# Altium PCB Controller.PcbDoc
Units mil, origin at the board's own origin, x right, y up, seen from the top; angles counter-clockwise.
Board outline 1190 x 2860 mil, 2 copper layers (Top Layer, Bottom Layer); 18 components, 12 nets, 56 pads, 16 vias.
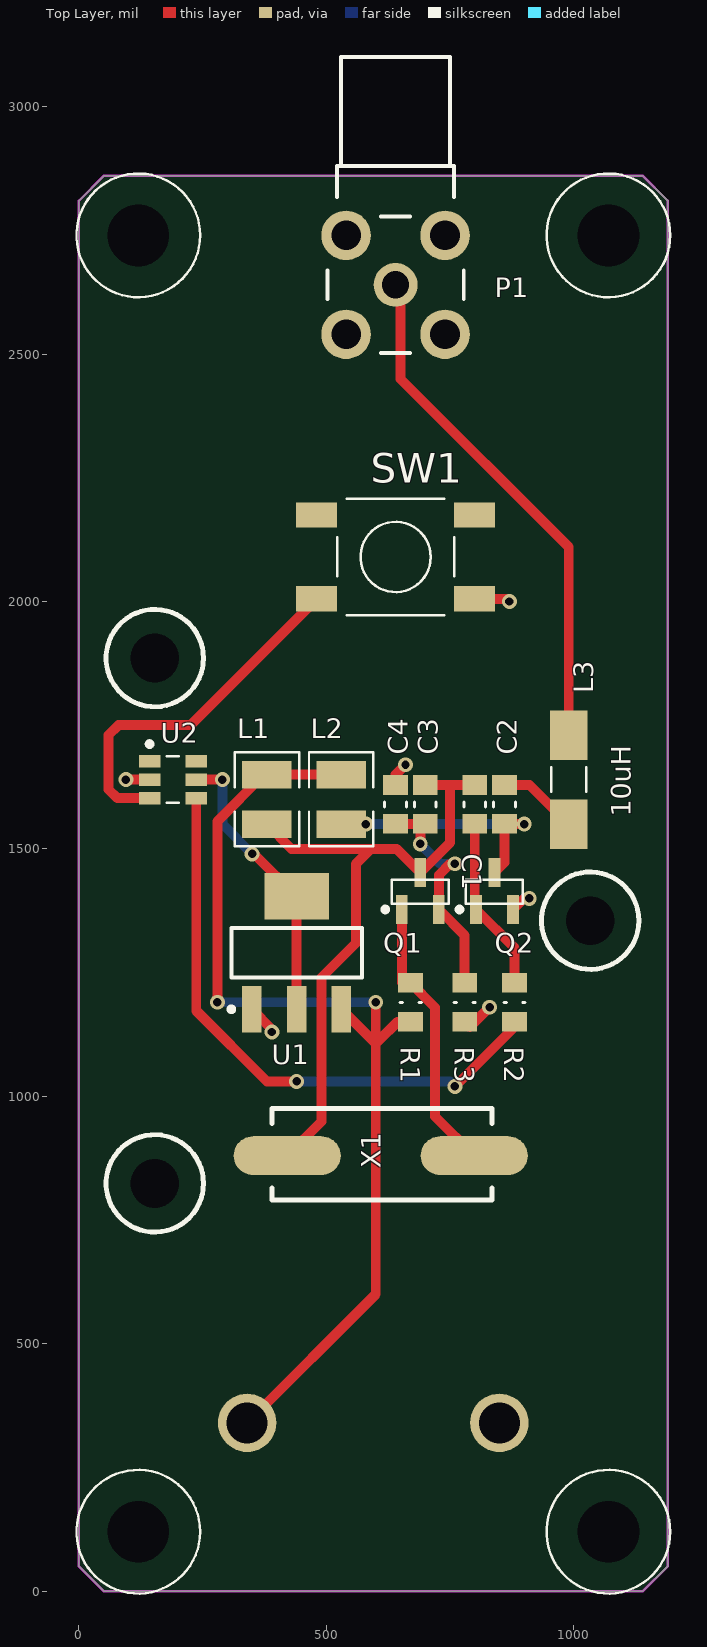
[diagram p0: Top Layer view]
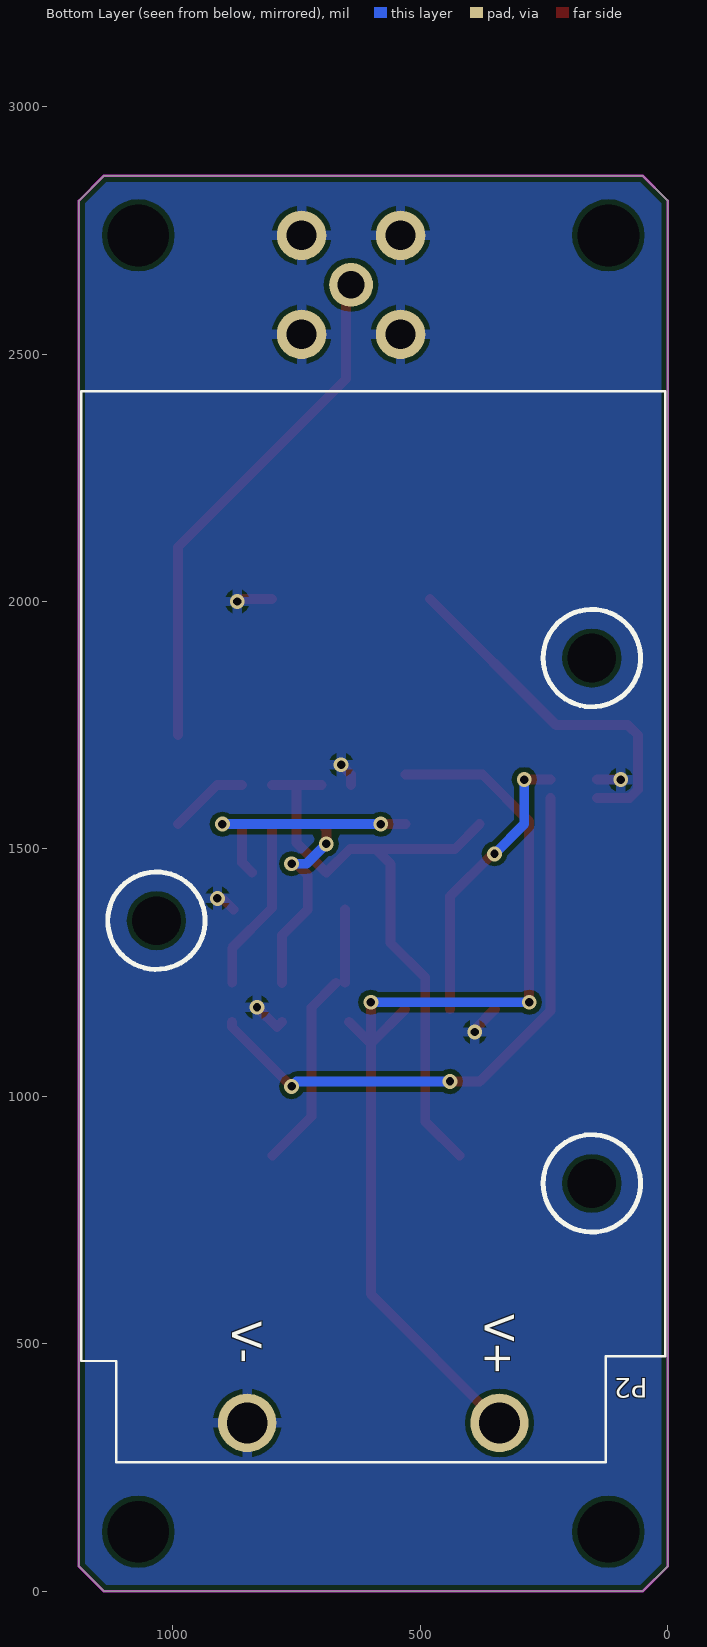
[diagram p1: Bottom Layer view, seen from below]
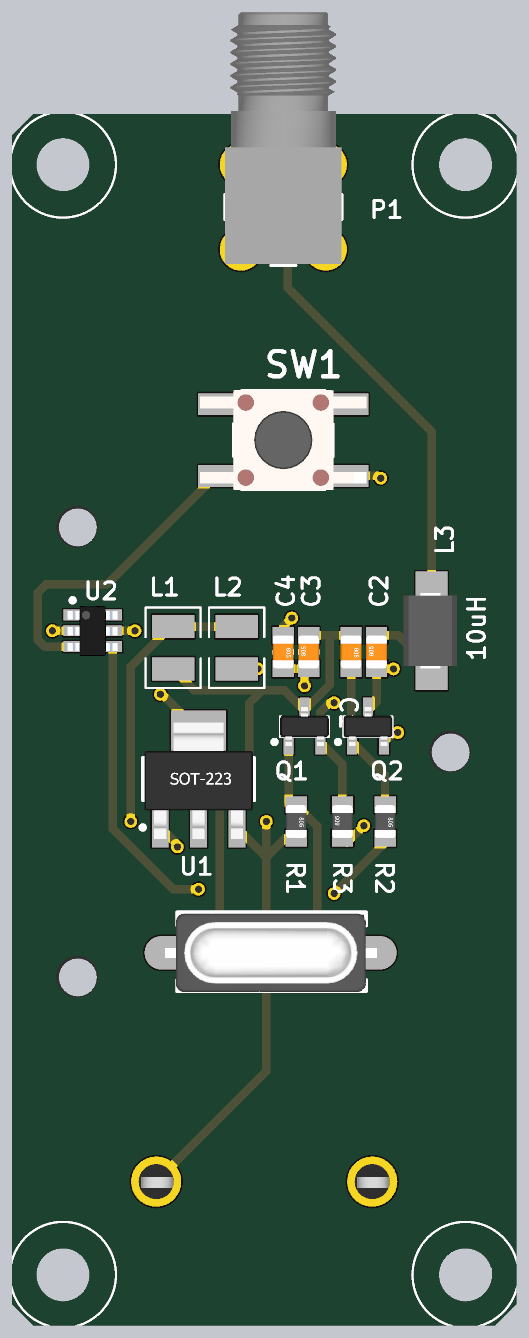
[diagram p2: 3D render of the assembled board from above, using the file's embedded part models]

## Layer stack, top to bottom
Top Layer: signal copper 1.4
Dielectric: dielectric 12.6, FR-4, Dk 4.8
Bottom Layer: signal copper 1.4

## Board outline
0,50 50,0 1140,0 1190,50 1190,2810 1140,2860 50,2860 0,2810

## Design rules (kind name [scope] priority, off if disabled: settings)
Clearance [All] p1: gap=10
PolygonConnect [All] p1: connectstyle=Relief reliefconductorwidth=20 reliefentries=4 polygonreliefangle="90 Angle"
RoutingVias [All] p1: holewidth=17 width=30 viastyle="Through Hole" minholewidth=17 minwidth=30 maxholewidth=28 maxwidth=50
SilkscreenOverComponentPads [All] p1: minsilkscreentomaskgap=10
SolderMaskExpansion [All] p1: expansion=4
Width [All] p1: maxlimit=50 minlimit=10 preferedwidth=20
27 further rules are at their usual default settings.

## Components (designator, comment, footprint, x,y, rotation, side; value= is the part's Value field where it differs from the comment)
C1 "Cap" "0805 - Cap Non-Polarized" 800,1590 r270 top
C2 "Cap" "0805 - Cap Non-Polarized" 860,1590 r90 top
C3 "Cap" "0805 - Cap Non-Polarized" 700,1590 r90 top
C4 "Cap" "0805 - Cap Non-Polarized" 640,1590 r270 top
L1 "Inductor" "1008 - INDUCTOR" 380,1600 r90 top
L2 "Inductor" "1008 - INDUCTOR" 530,1600 r90 top
L3 "Inductor" "1812 - Inductor" 990,1640 r90 top
P1 "Coax-F" SMA-Female-R/A-THT 640,2640 r270 top
P2 "Battery Holder" "Battery Holder - 9V - THT" 340,340 r270 bottom locked
Q1 "NPN" SOT23-3 690,1415 r90 top
Q2 "NPN" SOT23-3 840,1415 r90 top
R1 "Res" "0805 - Resistor" 670,1190 r270 top
R2 "Res" "0805 - Resistor" 880,1190 r270 top
R3 "Res" "0805 - Resistor" 780,1190 r90 top
SW1 "Tact Switch" "TE FSMJSMA" 640,2090 r0 top
U1 "LM1117" SOT223-3 440,1290 r90 top
U2 "MAX6817" SOT23-6 190,1640 r0 top
X1 "HC49US" HC49US 610,880 r180 top

## Footprints (in the part's own frame and the unit in brackets; to place one, negate y for a bottom-side part, rotate by r counter-clockwise, add the part's x,y. Pads: shape width x height; smd on the part's side, far side on the other; paste and mask are expansions set on the pad)
"0805 - Cap Non-Polarized" [mil]
  rect 40x50 smd: 1(-39.38,-0.01) 2(39.36,-0.01)
  silkscreen extent -5,-22 5,22, body extent -39,-25 39,25, height 31
"0805 - Resistor" [mil]
  rect 40x50 smd: 1(-39.38,0.39) 2(39.36,0.39)
  silkscreen extent 0,-21 0,22, body extent -39,-24 39,25, height 31
"1008 - INDUCTOR" [mil]
  rect 55x100 smd: 1(-50,0) 2(50,0)
  silkscreen extent -95,-65 95,65, body extent -49,-39 49,39, height 71
"1812 - Inductor" [mil]
  rect 100x75 smd: 1(-90,0) 2(90,0)
  silkscreen extent -25,-35 25,35, body extent -89,-60 89,66, height 126
"Battery Holder - 9V - THT" [mm]
  round 3 hole 2.1: 1(0,0) 2(0,-12.95)
  round 2 hole 2.5 unplated: ""(-39.26,4.74) ""(-25.78,-17.61) ""(-12.29,4.74)
  Bottom Overlay keep-out circle w0.254: c-39.26,4.74 r2.5
  Bottom Overlay keep-out circle w0.254: c-12.29,4.74 r2.5
  Bottom Overlay keep-out circle w0.254: c-25.78,-17.61 r2.5
  silkscreen extent -52.96,-21.46 2.03,8.51, body extent -52.96,-21.46 2.03,8.51, height 21.31
HC49US [mm]
  oval 5.5x2 smd: 1(-4.8,0) 2(4.8,0)
  silkscreen extent -5.71,-2.41 5.59,2.29, body extent -6.36,-2.35 6.34,2.35, height 4.2
SMA-Female-R/A-THT [mil]
  round 88.58 hole 55: 1(0,0)
  round 100 hole 60: 2(-100,-100) 3(-100,100) 4(100,100) 5(100,-100)
  silkscreen extent -461,-138 138,138, body extent -459,-138 135,138, height 388
SOT23-3 [mm]
  rect 1.5x0.6 smd: 1(-0.95,0.95) 2(-0.95,-0.95) 3(0.95,0)
  silkscreen extent -1.07,-1.45 0.58,1.92, body extent -1.19,-1.46 1.15,1.46, height 1
SOT23-6 [mm]
  rect 1.1x0.65 smd: 1(-1.2,0.95) 2(-1.2,0) 3(-1.2,-0.95) 4(1.2,-0.95) 5(1.2,0) 6(1.2,0.95)
  silkscreen extent -1.32,-1.19 0.3,1.95, body extent -1.5,-1.52 1.5,1.48, height 1.3
SOT223-3 [mm]
  rect 2.4x1 smd: 1(-2.9,2.3) 2(-2.9,0) 3(-2.9,-2.3)
  rect 2.4x3.3 smd: 2(2.9,0)
  silkscreen extent -3.02,-3.35 1.27,3.47, body extent -3.58,-3.25 3.38,3.25, height 1.65
"TE FSMJSMA" [mm]
  rect 2.1x1.3 smd: 1(-4.05,2.15) 2(-4.05,-2.15) 3(4.05,2.15) 4(4.05,-2.15)
  silkscreen extent -3,-3 3,3, body extent -5,-3 5,3, height 5

## Part data
C1: library part Cap-TDK-CGA-150pF-0805, "CAP CER 150PF 250V 5% NP0 0603"
C2: library part Cap-TDK-CGA-100pF-0805, "CAP CER 100PF 100V 5% NP0 0805"
C3: library part Cap-TDK-CGA-68pF-0805, "CAP CER 68PF 100V 5% NP0 0603"
C4: library part Cap-TDK-CGA-27pF-0805, "CAP CER 27PF 50V 5% NP0 0603"
L1 L2: library part Murata-LQW2UA-Ind-AirCore-2.2uH, "IND 2200NH 280MA SRF 130MHZ 1008"
L3: library part Ind-Panasonic-FB-10µH-1812, "INDUCTOR 10 UH 5% 1812 SMD"
P1: library part coax-sma-ra-tht, "CONN SMA JACK R/A 50 OHM PCB"
P2: library part "Battery Holder-9V-THT-Open", "HOLDER BATTERY 9V PC MOUNT"
Q1 Q2: library part MMBT2222A-7-F, "TRANS NPN 40V 350MW SMD SOT23-3"
R1: library part Yagao-RC0805-100k, "RES 100K OHM 1/8W 5% 0805 SMD"
R2: library part Yagao-RC0805-22k, "RES 22K OHM 1/8W 5% 0805 SMD"
R3: library part Yagao-RC0805-100, "RES 100 OHM 1/8W 5% 0805 SMD"
SW1: library part TactSwitch-SMD-Vertical-GullWing-6x6, "SWITCH TACTILE SPST-NO 0.05A 12V"
U1: library part "LM1117 5v SOT223-3", "Regulator LDO 5V"
U2: "IC DEBOUNCER SWITCH DUAL SOT23-6"
X1: library part TXC-9C-27MHz, "CRYSTAL 27MHZ 18PF SMD"

## Free pads (board coordinates)
  round 0 hole 125 unplated: MH(120,120) MH(120,2740) MH(1070,120) MH(1070,2740)

## Via types
v1: diameter 30, hole 17, Top Layer to Bottom Layer, 16 vias

## Nets (pads, with @x,y where several pads share a name; then routed paths per layer and width w, separated by ;. In a path a pad name is that pad's centre, name@x,y a point inside that pad or via, vN(x,y) a via of type N, cw(c..) or ccw(c..) an arc to the next point about the centre after c; other vN are vias at no path point)
+5V: U1.2 U2.5 | length 581.5
  Top Layer w20: U2.5 v1(290,1640) ; v1(350,1490) 354.17,1490 440,1404.17 U1.2@440,1175.83
  Bottom Layer w20: v1(290,1640) 290,1550 v1(350,1490)
COM: C4.1 P1.2 P1.3 P1.4 P1.5 P2.2 Q2.2 R3.1 SW1.4 U1.1 U2.2 | length 345.4
  Top Layer w20: v1(95,1640) U2.2 ; U1.1 390,1135.28 v1(390,1130) ; C4.1 639.99,1649.99 v1(660,1670) ; R3.1 779.61,1150.39 790,1140 v1(830,1180) ; SW1.4 864.65,2005.35 v1(870,2000) ; Q2.2 899.8,1400 v1(910,1400)
NetC1_1: C1.1 C3.2 L1.1 Q1.3 X1.2 | length 1342.2
  Top Layer w20: L1.1 430,1500 590,1500 ; X1.2 490,948.98 490,1240 560,1310 560,1470 590,1500 ; C3.2 750,1629.36 ; C1.1 750,1629.36 ; 590,1500 642.4,1500 Q1.3 750,1512.4 750,1629.36
NetC1_2: C1.2 Q2.1 R2.1 | length 354.4
  Top Layer w20: C1.2 799.99,1380.2 Q2.1 880,1300.2 R2.1@880,1229.38
NetC2_1: C2.1 L2.1 Q2.3 | length 516.8
  Top Layer w20: L2.1 v1(580,1550) ; Q2.3 860.01,1472.41 C2.1 860.63,1550 v1(900,1550)
  Bottom Layer w20: v1(580,1550) v1(900,1550)
NetC2_2: C2.2 L3.1 | length 162.9
  Top Layer w20: C2.2 910.64,1629.36 L3.1
NetC3_1: C3.1 C4.2 Q1.2 R3.2 | length 473
  Top Layer w20: C4.2 C3.1 690,1540.62 v1(690,1510) ; v1(760,1470) 750.02,1470 727.4,1447.38 Q1.2 779.61,1325.39 R3.2
  Bottom Layer w20: v1(690,1510) 730,1470 v1(760,1470)
NetL3_2: L3.2 P1.1 | length 1055
  Top Layer w20: P1.1 650,2630 650,2450 990,2110 L3.2
NetQ1_1: Q1.1 R1.1 X1.1 | length 550.9
  Top Layer w20: R1.1@652.6,1229.38 Q1.1 ; R1.1 720,1179.76 720,958.98 X1.1
NetR2_2: R2.2 U2.4 | length 1196.4
  Top Layer w20: U2.4 237.24,1172.76 380,1030 v1(440,1030) ; v1(760,1020) 880.39,1140.39 R2.2
  Bottom Layer w20: v1(440,1030) 750,1030 v1(760,1020)
NetSW1_2: SW1.2 U2.3 | length 734.6
  Top Layer w20: U2.3 77.4,1602.6 60,1620 60,1730 80,1750 225.2,1750 SW1.2
VBATT: L1.2 L2.2 P2.1 R1.2 U1.3 | length 2089.3
  Top Layer w20: v1(280,1190) 280,1555.78 374.22,1650 L1.2 L2.2 ; P2.1 600,600 600,1106.38 ; U1.3 600,1106.38 ; v1(600,1190) 600,1120 606.81,1113.19 ; 644.26,1150.64 606.81,1113.19 ; 600,1106.38 606.81,1113.19
  Bottom Layer w20: v1(280,1190) v1(600,1190)
pads on no net: P2. SW1.1 SW1.3 U2.1 U2.6

## Polygon pours and split planes (outlines as drawn)
COM on Bottom Layer "GND Place" (solid, pour order 4): 1190,2810 1140,2860 50,2860 0,2810 0,50 50,0 1140,0 1190,50 1190,2810

## Keep-outs
Keep-Out Layer:
  the board outline again, w5

## Silkscreen, mask and mechanical layers (free items; w line width, h text height)
Top Overlay:
  circle w5: c120,2740 r125
  circle w5: c1070,2740 r125
  circle w5: c1070,120 r125
  circle w5: c120,120 r125
  text "10uH" at 1115,1565 h40 r90

## Text inside footprints (layer, text, board x,y; h text height)
P2: Bottom Overlay "V+" at 370,560 h60 r90; Bottom Overlay "V-" at 880,545 h60 r90